# Altium PCB VT 8S LHS Bot V0.1.PcbDoc
Units mm, origin at the board's own origin, x right, y up, seen from the top; angles counter-clockwise.
Board outline 148.67 x 78 mm, 2 copper layers (Top Layer, Bottom Layer), stack 0.049 mm thick; 5 components, 4 nets, 15 pads, 24 vias.
Unrouted connection lines stored in the file: 7.
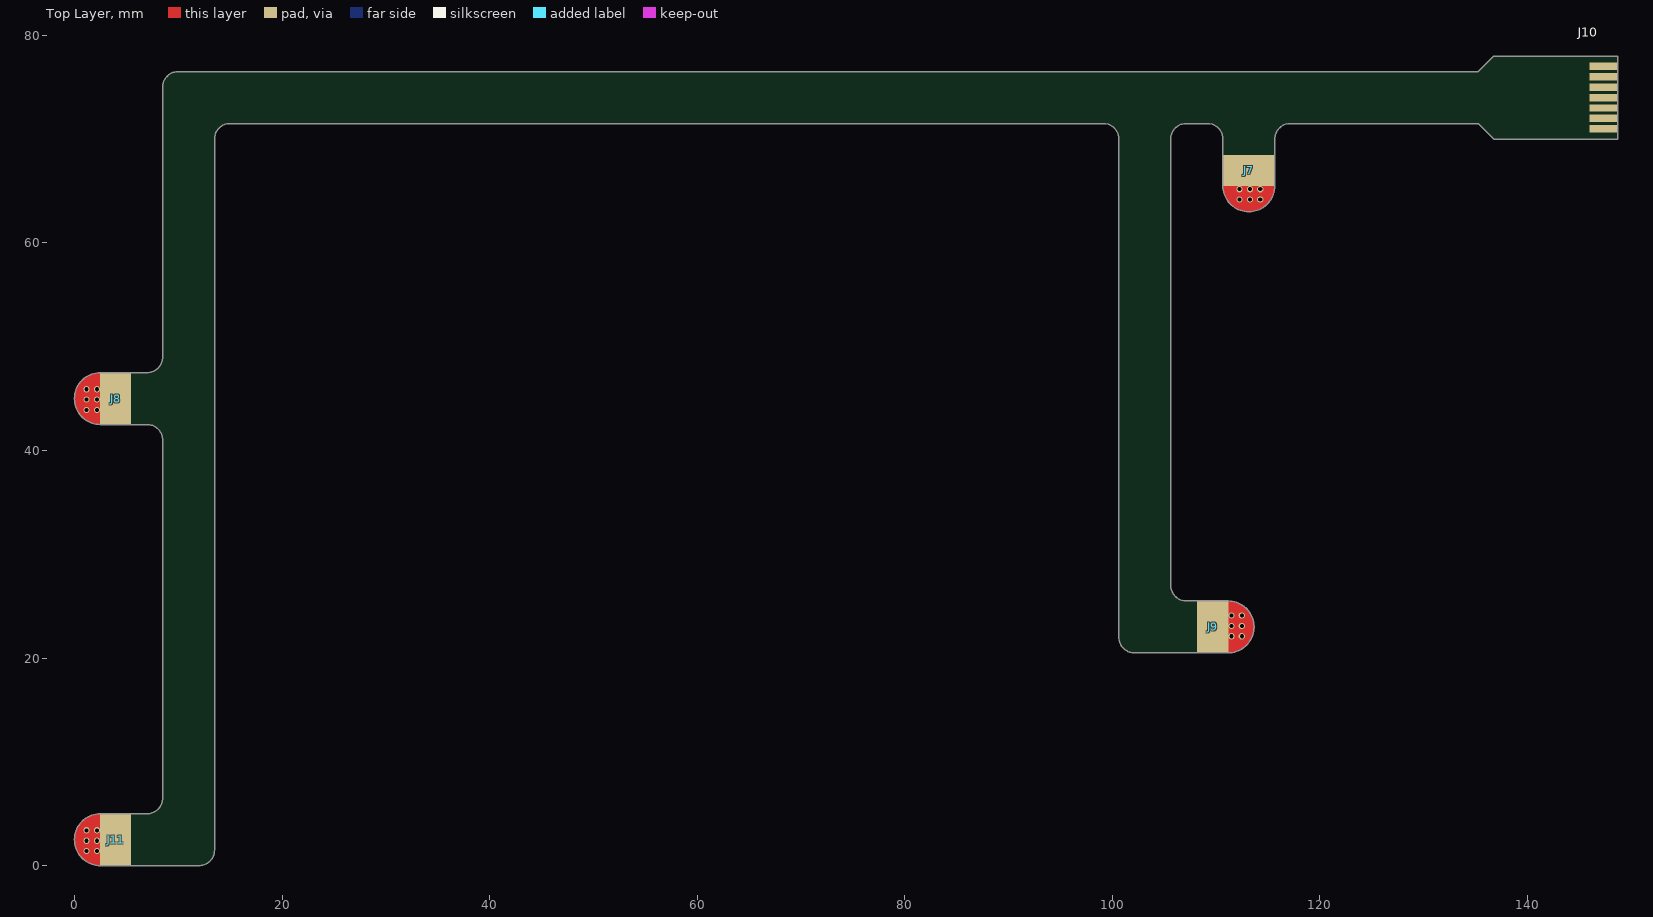
[diagram p0: Top Layer view]
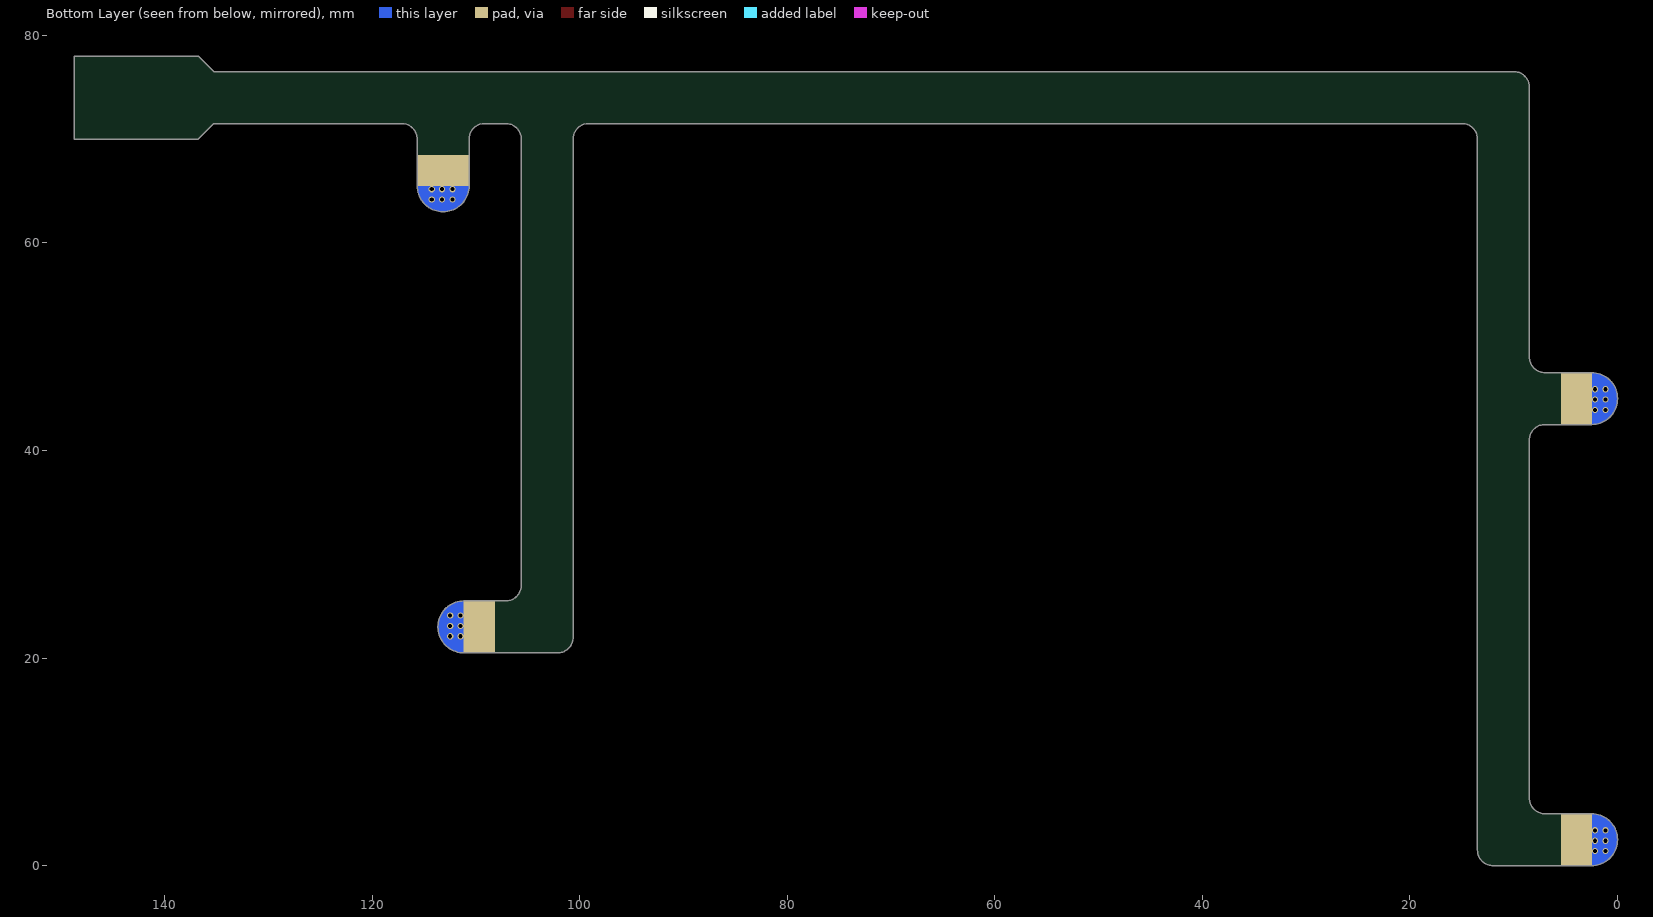
[diagram p1: Bottom Layer view, seen from below]

## Layer stack, top to bottom
Top Solder: solder mask 0.0275, Polyimide, Dk 3.5
Top Layer: signal copper 0.012
Dielectric 1: dielectric 0.025, Polyimide, Dk 3.3
Bottom Layer: signal copper 0.012
Bottom Solder: solder mask 0.0275, Polyimide, Dk 3.5

## Board outline
2.5,0 cw(c2.5,2.5) 0,2.5 cw(c2.5,2.5) 2.5,5 5.475,5 7,5 ccw(c7,6.5) 8.5,6.5 8.5,41 ccw(c7,41) 7,42.5 5.475,42.5 2.5,42.5 cw(c2.5,45) 0,45 cw(c2.5,45) 2.5,47.5 7,47.5 ccw(c7,49) 8.5,49 8.5,75 cw(c10,75) 10,76.5 135.25,76.5 136.75,78 148.675,78 148.675,70 136.75,70 135.25,71.5 117.15,71.5 ccw(c117.15,70) 115.65,70 115.65,65.5 cw(c113.15,65.5) 113.15,63 cw(c113.15,65.5) 110.65,65.5 110.65,70 ccw(c109.15,70) 109.15,71.5 107.125,71.5 ccw(c107.125,70) 105.625,70 105.625,27 ccw(c107.125,27) 107.125,25.5 111.15,25.5 cw(c111.15,23) 113.65,23 cw(c111.15,23) 111.15,20.5 105.325,20.5 102.125,20.5 cw(c102.125,22) 100.625,22 100.625,70 ccw(c99.125,70) 99.125,71.5 15,71.5 ccw(c15,70) 13.5,70 13.5,1.5 cw(c12,1.5) 12,0
board region Flex: 129.275,71.5 117.15,71.5 117.003,71.493 116.715,71.435 116.443,71.323 116.198,71.16 115.99,70.952 115.827,70.707 115.715,70.435 115.657,70.147 115.65,70 115.65,65.5 115.65,65.254 115.554,64.771 115.365,64.316 115.092,63.906 114.744,63.558 114.334,63.285 113.879,63.096 113.396,63 113.15,63 112.904,63 112.421,63.096 111.966,63.285 111.556,63.558 111.208,63.906 110.935,64.316 110.746,64.771 110.65,65.254 110.65,65.5 110.65,70 110.643,70.147 110.585,70.435 110.473,70.707 110.31,70.952 110.102,71.159 109.857,71.323 109.585,71.435 109.297,71.493 109.15,71.5 107.125,71.5 106.978,71.493 106.69,71.435 106.418,71.323 106.173,71.16 105.965,70.952 105.802,70.707 105.69,70.435 105.632,70.147 105.625,70 105.625,27 105.632,26.853 105.69,26.565 105.802,26.293 105.965,26.048 106.173,25.84 106.418,25.677 106.69,25.565 106.978,25.507 107.125,25.5 111.15,25.5 111.396,25.5 111.879,25.404 112.334,25.215 112.744,24.942 113.092,24.594 113.365,24.184 113.554,23.729 113.65,23.246 113.65,23 113.65,22.754 113.554,22.271 113.365,21.816 113.092,21.406 112.744,21.058 112.334,20.785 111.879,20.596 111.396,20.5 111.15,20.5 105.325,20.5 102.125,20.5 101.977,20.5 101.687,20.558 101.414,20.671 101.169,20.835 100.96,21.044 100.796,21.289 100.683,21.562 100.625,21.852 100.625,22 100.625,70 100.618,70.147 100.56,70.435 100.448,70.707 100.285,70.952 100.077,71.16 99.832,71.323 99.56,71.435 99.272,71.493 99.125,71.5 15,71.5 14.853,71.493 14.565,71.435 14.293,71.323 14.048,71.159 13.84,70.952 13.677,70.707 13.565,70.435 13.507,70.147 13.5,70 13.5,1.5 13.5,1.352 13.442,1.062 13.329,0.789 13.165,0.544 12.956,0.335 12.711,0.171 12.438,0.058 12.148,0 12,0 2.5,0 2.254,0 1.771,0.096 1.316,0.285 0.906,0.558 0.558,0.906 0.285,1.316 0.096,1.771 0,2.254 0,2.5 0,2.746 0.096,3.229 0.285,3.684 0.558,4.094 0.906,4.442 1.316,4.715 1.771,4.904 2.254,5 2.5,5 5.475,5 7,5 7.147,5.007 7.435,5.065 7.707,5.177 7.952,5.34 8.16,5.548 8.323,5.793 8.435,6.065 8.493,6.353 8.5,6.5 8.5,41 8.493,41.147 8.435,41.435 8.323,41.707 8.16,41.952 7.952,42.159 7.707,42.323 7.435,42.435 7.147,42.493 7,42.5 5.475,42.5 2.5,42.5 2.254,42.5 1.771,42.596 1.316,42.785 0.906,43.058 0.558,43.406 0.285,43.816 0.096,44.271 0,44.754 0,45 0,45.246 0.096,45.729 0.285,46.184 0.558,46.594 0.906,46.942 1.316,47.215 1.771,47.404 2.254,47.5 2.5,47.5 7,47.5 7.147,47.507 7.435,47.565 7.707,47.677 7.952,47.84 8.16,48.048 8.323,48.293 8.435,48.565 8.493,48.853 8.5,49 8.5,75 8.5,75.148 8.558,75.438 8.671,75.711 8.835,75.956 9.044,76.165 9.289,76.329 9.562,76.442 9.852,76.5 10,76.5 129.275,76.5
board region Anchor: 129.275,76.5 135.25,76.5 136.75,78 148.675,78 148.675,70 136.75,70 135.25,71.5 129.275,71.5

## Design rules (kind name [scope] priority, off if disabled: settings)
Clearance [All] p1: gap=0.152 ignorepadtopadclearanceinfootprint=FALSE
DiffPairsRouting [All] p1: maxlimit=0.254 minlimit=0.254 mostfreqgap=0.254 toplayer_minwidth=0.381 toplayer_maxwidth=0.381 toplayer_prefwidth=0.381 bottomlayer_minwidth=0.381 bottomlayer_maxwidth=0.381 bottomlayer_prefwidth=0.381 substack1={34D787CE-2DC0-4B00-A6B0-2647A249037B} toplayer_{34d787ce-2dc0-4b00-a6b0-2647a249037b}_minwidth=0.381 toplayer_{34d787ce-2dc0-4b00-a6b0-2647a249037b}_maxwidth=0.381 toplayer_{34d787ce-2dc0-4b00-a6b0-2647a249037b}_prefwidth=0.381 bottomlayer_{34d787ce-2dc0-4b00-a6b0-2647a249037b}_minwidth=0.381 bottomlayer_{34d787ce-2dc0-4b00-a6b0-2647a249037b}_maxwidth=0.381 bottomlayer_{34d787ce-2dc0-4b00-a6b0-2647a249037b}_prefwidth=0.381 maxuncoupledlength=12.7
HoleToHoleClearance [All] p1: gap=0.254 allowstackedmicrovias=FALSE
PolygonConnect [All] p1: connectstyle=Direct reliefconductorwidth=0.254 reliefentries=4 polygonreliefangle="90 Angle" airgapwidth=0.254
RoutingVias [All] p1: holewidth=0.4 width=0.7 viastyle="Through Hole" minholewidth=0.2 minwidth=0.4 maxholewidth=1 maxwidth=1.2
SolderMaskExpansion SolderMaskExpansion_Via [IsVia] p1: expansion=0.102 istentingtop=TRUE
SolderMaskExpansion [All] p2: expansion=0.051 istentingtop=FALSE
Width [All] p1: maxlimit=2.54 minlimit=0.152 preferedwidth=0.254 substack1={34D787CE-2DC0-4B00-A6B0-2647A249037B}
28 further rules are at their usual default settings.

## Components (designator, comment, footprint, x,y, rotation, side; value= is the part's Value field where it differs from the comment)
J7 "Voltage Tap" "Voltage Tap" 113.15,66.975 r90 top
J8 "Voltage Tap" "Voltage Tap" 3.975,45 r0 top
J9 "Voltage Tap" "Voltage Tap" 109.675,23 r180 top
J10 "84953-7-FPC" "84953-7 - FPC" 147.3,74 r270 top
J11 "Voltage Tap" "Voltage Tap" 3.975,2.5 r0 top

## Footprints (in the part's own frame and the unit in brackets; to place one, negate y for a bottom-side part, rotate by r counter-clockwise, add the part's x,y. Pads: shape width x height; smd on the part's side, far side on the other; paste and mask are expansions set on the pad)
"84953-7 - FPC" [mm] "FPC Connectors, Flex-to-Board, 7 Position, .039 in [1 mm] Centerline, FPC Connector, Top Contact"
  rect 0.71x2.7 smd: 1(-3,0) 2(-2,0) 3(-1,0) 4(0,0) 5(1,0) 6(2,0) 7(3,0)
"Voltage Tap" [mm] "Voltage Tap"
  rect 3x5 smd mask+0: 1(0,0)
  rect 3x5 smd far side mask+0: 1(0,0)
  Top Layer region: -1.475,2.5 -1.475,-2.5 -2.56,-2.252 -3.43,-1.559 -3.912,-0.556 -3.912,0.556 -3.43,1.559 -2.56,2.252 -1.475,2.5
  Bottom Layer region: -1.475,2.5 -1.475,-2.5 -2.56,-2.252 -3.43,-1.559 -3.912,-0.556 -3.912,0.556 -3.43,1.559 -2.56,2.252 -1.475,2.5
  Bottom Layer region: -1.475,2.5 -1.475,-2.5 -2.56,-2.252 -3.43,-1.559 -3.912,-0.556 -3.912,0.556 -3.43,1.559 -2.56,2.252 -1.475,2.5

## Part data
J10: "FPC Connectors, Flex-to-Board, 7 Position, .039 in [1 mm] Centerline, FPC Side Connector"

## Via types
v1: diameter 0.6, hole 0.4, Top Layer to Bottom Layer, tented both sides, 24 vias

## Nets (pads, with @x,y where several pads share a name; then routed paths per layer and width w, separated by ;. In a path a pad name is that pad's centre, name@x,y a point inside that pad or via, vN(x,y) a via of type N, cw(c..) or ccw(c..) an arc to the next point about the centre after c; other vN are vias at no path point)
NetJ7_1: J7.1 J10.1
  other v1: 112.25,64.175 113.25,64.175 114.25,64.175 112.25,65.175 113.25,65.175 114.25,65.175
NetJ8_1: J8.1 J10.2
  other v1: 1.175,43.9 2.175,43.9 1.175,44.9 2.175,44.9 1.175,45.9 2.175,45.9
NetJ9_1: J9.1 J10.3
  other v1: 111.475,22.1 112.475,22.1 111.475,23.1 112.475,23.1 111.475,24.1 112.475,24.1
NetJ10_4: J10.4 J10.5 J10.6 J10.7 J11.1
  other v1: 1.175,1.4 2.175,1.4 1.175,2.4 2.175,2.4 1.175,3.4 2.175,3.4

## Silkscreen, mask and mechanical layers (free items; w line width, h text height)
Board Shape:
  lines w0.05: 5.475,0 12,0 ccw(c12,1.5) 13.5,1.5 13.5,70 cw(c15,70) 15,71.5 99.125,71.5 cw(c99.125,70) 100.625,70 100.625,22 ccw(c102.125,22) 102.125,20.5 104.9,20.5 105.325,20.5 108.175,20.5 ; 5.475,5 7,5 ccw(c7,6.5) 8.5,6.5 8.5,41 ccw(c7,41) 7,42.5 5.475,42.5 ; 5.475,47.5 7,47.5 ccw(c7,49) 8.5,49 8.5,75 cw(c10,75) 10,76.5 135.25,76.5 136.75,78 148.675,78 148.675,70 136.75,70 135.25,71.5 117.15,71.5 ccw(c117.15,70) 115.65,70 115.65,68.475 ; 108.175,25.5 107.125,25.5 cw(c107.125,27) 105.625,27 105.625,70 cw(c107.125,70) 107.125,71.5 109.15,71.5 cw(c109.15,70) 110.65,70 110.65,68.475
Mechanical Colab:
  lines w0.013: 16,71.5 16,76.5 ; 19.22,71.5 19.22,76.5 ; 89.92,71.5 89.92,76.5 ; 93.14,71.5 93.14,76.5 ; 110.64,71.5 105.64,71.5 105.64,25.5 113.64,25.5 113.64,20.5 100.64,20.5 100.64,71.5 13.5,71.5 13.5,0 0,0 0,5 8.5,5 8.5,42.5 0,42.5 0,47.5 8.5,47.5 8.5,76.5 146.14,76.5 146.14,71.5 115.64,71.5

## Text inside footprints (layer, text, board x,y; h text height)
J10: Stiffener Backing "Total FPC width on stiffener / 0.3mm +- 0.05mm" at 149.1,78.975 h1 r270